# EAGLE board iv4_4lw_tubes_rotated (EAGLE 5.06)
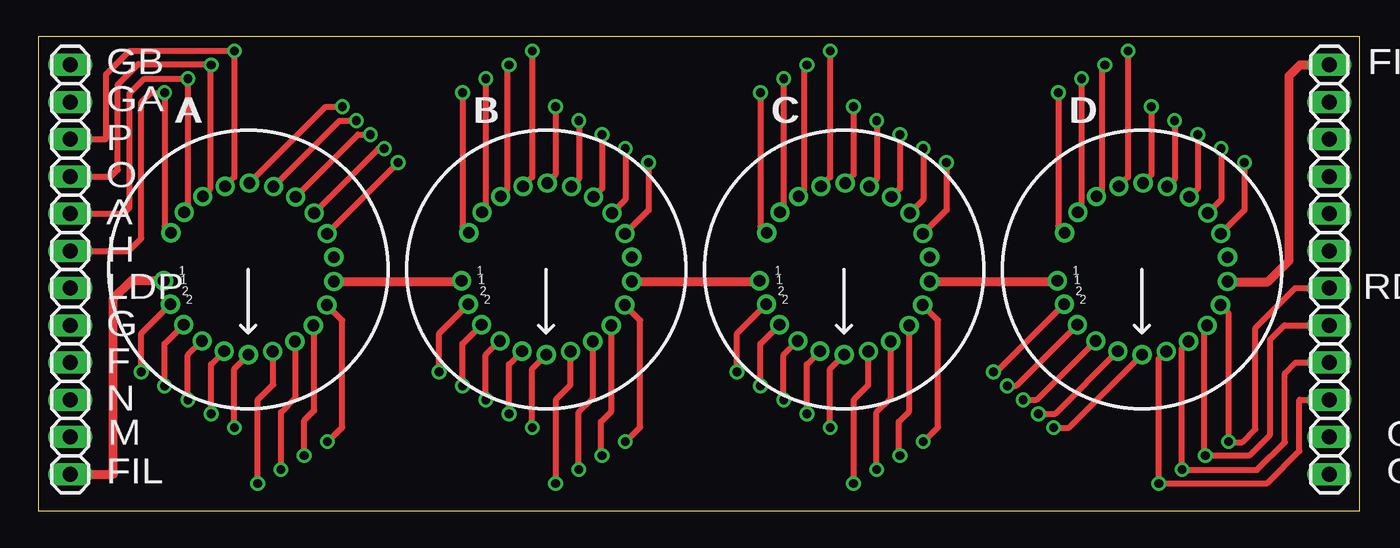
[diagram p0: board, top side]
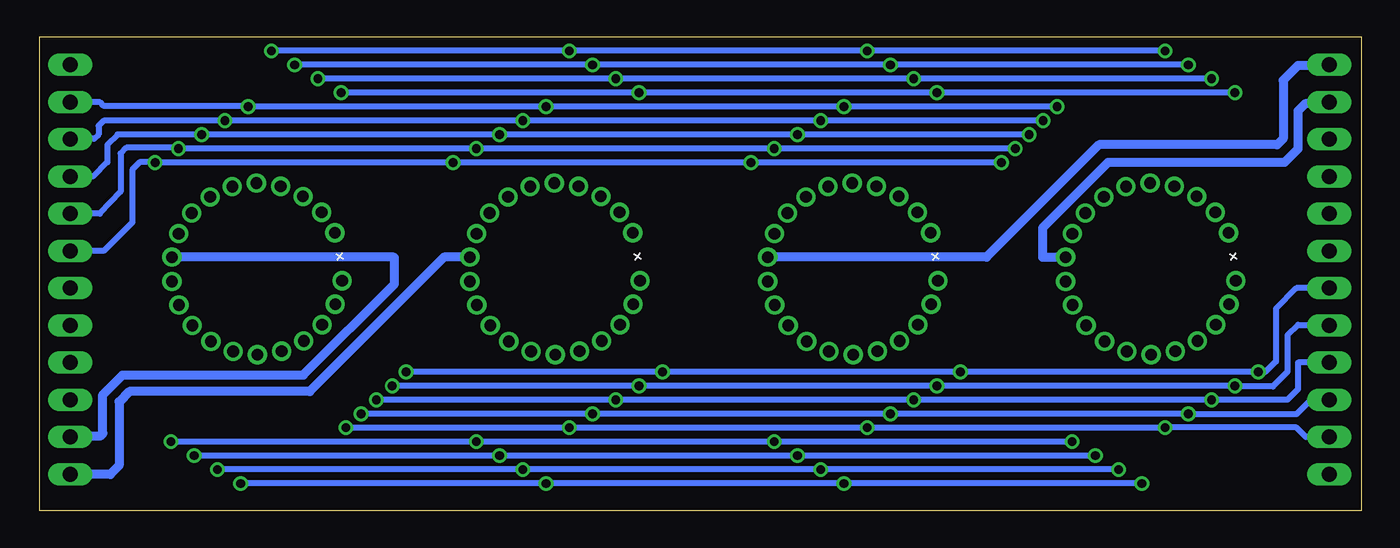
[diagram p1: board, bottom side, seen from below]

Size 90.13 x 32.38 mm. Coordinates in mm from the lower left corner, seen from the top.
Outline: 0,0 90.13,0 90.13,32.37 0,32.38 0,0
Copper layers (1*16): Top 0.035mm / dielectric 1.5mm / Bottom 0.035mm
Design rules "default": minimum track width 10mil, minimum drill 5mil, track to track 5mil, track to pad 5mil, pad to pad 5mil, via to via 5mil, smd to smd 5mil, copper to edge 10mil, drill to drill 8mil, minimum pad ring 10mil, minimum via ring 8mil, stop-mask expansion 4mil, vias tented up to drill 0mil, thermal gap 10mil

## Footprints (pad centres in the part's own frame; a part is rotated, then mirrored left to right if it is on the bottom)
IV-4 = drill 0.8 round: 1 -5.769,-0.759; 2 -5.308,-2.362; 3 -4.414,-3.77; 4 -3.16,-4.869; 5 -1.647,-5.571; 6 0.003,-5.817; 7 1.655,-5.589; 8 3.176,-4.904; 9 4.442,-3.819; 10 5.352,-2.421; 11 5.831,-0.824; 12 5.84,0.844; 13 5.379,2.447; 14 4.485,3.855; 15 3.231,4.954; 16 1.717,5.655; 17 0.068,5.902; 18 -1.584,5.674; 19 -3.105,4.989; 20 -4.372,3.904; 21 -5.281,2.506
1X12 = drill 1.016 long: 1 -13.97,0; 2 -11.43,0; 3 -8.89,0; 4 -6.35,0; 5 -3.81,0; 6 -1.27,0; 7 1.27,0; 8 3.81,0; 9 6.35,0; 10 8.89,0; 11 11.43,0; 12 13.97,0

## Placement (x,y rotation side)
A  IV-4  [IV-4]  14.33,16.48 0 top
B  IV-4  [IV-4]  34.65,16.48 0 top
C  IV-4  [IV-4]  54.97,16.48 0 top
D  IV-4  [IV-4]  75.29,16.48 0 top
JP1  [1X12]  88.06,16.48 270 top
JP2  [1X12]  2.17,16.48 270 top

## Library data of the parts
A B C D = IV-4
JP1 JP2 = pinhead

## Nets
N$1: A.11 B.1
N$2: B.11 C.1
N$3: C.11 D.1
N$4: D.11 JP1.1
N$5: C.12 JP1.12
N$6: D.12 JP1.11
N$7: B.12 JP2.1
N$8: A.12 JP2.2
N$9: A.1 JP2.12
SEG1: A.3 B.3 C.3 D.3 JP2.8
SEG2: A.9 B.9 C.9 D.9 JP1.8
SEG3: A.10 B.10 C.10 D.10 JP1.7
SEG4: A.14 B.14 C.14 D.14 JP1.5
SEG5: A.15 B.15 C.15 D.15 JP1.4
SEG6: A.19 B.19 C.19 D.19 JP2.4
SEG7: A.20 B.20 C.20 D.20 JP2.5
SEG8: A.2 B.2 C.2 D.2 JP2.7
SEG9: A.6 B.6 C.6 D.6 JP2.11
SEG10: A.7 B.7 C.7 D.7 JP1.10
SEG11: A.8 B.8 C.8 D.8 JP1.9
SEG12: A.16 B.16 C.16 D.16 JP1.3
SEG13: A.17 B.17 C.17 D.17 JP1.2
SEG14: A.18 B.18 C.18 D.18 JP2.3
SEG15: A.4 B.4 C.4 D.4 JP2.9
SEG16: A.5 B.5 C.5 D.5 JP2.10
SEG17: A.21 B.21 C.21 D.21 JP2.6
SEG18: A.13 B.13 C.13 D.13 JP1.6

## Tracks (layer width: path | path; a pad name or v marks a point on that pad's centre or on a via)
N$1
  Top 0.61: B.1 28.81,15.66 A.11
N$2
  Top 0.61: C.1 49.13,15.66 B.11
N$3
  Top 0.61: D.1 69.45,15.66 C.11
N$4
  Top 0.61: JP1.1 87.87,30.45 87.88,30.46 86.08,30.46 85.32,29.7 85.32,17.1 83.86,15.64 81.12,15.64 D.11
N$5
  Bottom 0.61: JP1.12 88.03,2.51 88.02,2.5 85.32,2.5 84.72,3.1 84.72,7.46 84.02,8.16 71.72,8.16 62.56,17.33 C.12
N$6
  Bottom 0.61: JP1.11 88.06,5.06 88.02,5.1 86.02,5.1 85.82,5.3 85.88,5.3 85.88,7.88 84.48,9.27 72.16,9.27 65.94,15.5 65.94,17.27 65.99,17.33 D.12
N$7
  Bottom 0.61: JP2.1 2.22,30.5 2.32,30.4 4.32,30.4 5.32,29.4 5.32,25.4 5.73,25 17.88,25 25.55,17.33 B.12
N$8
  Bottom 0.61: JP2.2 2.21,27.91 2.32,27.8 3.82,27.8 4.32,27.3 4.32,24.7 5.24,23.78 17.26,23.78 21.74,19.31 21.74,17.33 A.12
N$9
  Top 0.61: JP2.12 5.12,2.51 5.12,14.5 6.37,15.75 8.53,15.75 A.1
SEG1  (via drill 0.6)
  Top 0.406: D.3 66.7,8.54 v66.09,8.54 | C.3 49.25,11.41 v49.25,8.54 | B.3 28.93,11.41 v28.93,8.54 | A.3 8.61,11.41 v8.61,8.54
  Bottom 0.406: v66.09,8.54 v49.25,8.54 v28.93,8.54 v8.61,8.54 8.61,8.51 8.62,8.5 6.02,8.5 5.02,9.5 5.02,12 4.32,12.7 4.29,12.67 JP2.8
SEG2  (via drill 0.6)
  Top 0.406: JP1.8 84.99,12.67 84.02,11.7 84.02,5.2 82.62,3.8 79.63,3.8 v79.61,3.78 v79.6,3.78 79.53,3.78 79.53,12.46 D.9 | A.9 18.82,12.61 18.82,6.86 18.14,6.18 v18.14,3.78 | B.9 39.09,6.81 38.38,6.1 38.38,3.86 v38.46,3.78 | C.9 59.41,6.81 58.7,6.1 58.7,3.86 v58.78,3.78
  Bottom 0.406: v79.6,3.78 v58.78,3.78 v38.46,3.78 v18.14,3.78
SEG3  (via drill 0.6)
  Top 0.406: JP1.7 85.73,15.21 83.02,12.5 83.02,5.6 82.12,4.7 81.33,4.7 81.23,4.8 81.19,4.76 v81.19,4.73 81.19,13.51 D.10 | v19.72,4.73 20.71,5.72 20.72,5.72 20.72,13.01 A.10 | v40.04,4.73 40.06,4.73 41.04,5.72 41.04,13.01 B.10 | v60.36,4.73 60.38,4.73 61.36,5.72 61.36,13.01 C.10
  Bottom 0.406: v81.19,4.73 v60.36,4.73 v40.04,4.73 v19.72,4.73
SEG4  (via drill 0.6)
  Top 0.406: A.14 23.21,24.74 v23.6,24.74 | B.14 40.04,21.25 v40.04,24.74 | C.14 60.36,21.25 v60.36,24.74 | D.14 80.68,21.25 v80.68,24.74
  Bottom 0.406: v80.68,24.74 v60.36,24.74 39.98,24.74 | v23.6,24.74 39.98,24.74 | v40.04,24.74 40.04,24.78 40.03,24.79 39.98,24.74 | JP1.5 86.04,20.29 84.62,21.8 84.62,24.4 84.22,24.8 80.62,24.8 v80.68,24.74
SEG5  (via drill 0.6)
  Top 0.406: A.15 21.81,25.69 v22.64,25.69 | B.15 38.46,22.01 v38.46,25.69 | C.15 58.78,22.01 v58.78,25.69 | D.15 79.1,22.01 v79.1,25.69
  Bottom 0.406: v22.64,25.69 v38.46,25.69 v58.78,25.69 v79.1,25.69 79.1,25.73 79.12,25.7 84.82,25.7 85.52,25 85.52,23.8 86.5,22.83 JP1.4
SEG6  (via drill 0.6)
  Top 0.406: v11.79,30.45 | JP2.4 4.95,22.83 5.42,23.3 5.42,29.1 6.82,30.5 11.62,30.5 11.72,30.4 v11.77,30.45 v11.79,30.45 | B.19 31.98,21.91 31.98,30.32 v32.11,30.45 | v52.43,30.45 52.22,30.25 52.22,21.83 C.19 | v72.75,30.45 72.54,30.25 72.54,21.83 D.19 | A.19 11.71,21.96 11.71,30.37 v11.79,30.45
  Bottom 0.406: v72.75,30.45 v52.43,30.45 v32.11,30.45 v11.79,30.45
SEG7  (via drill 0.6)
  Top 0.406: v10.2,29.5 10.16,29.5 | JP2.5 5.81,20.29 6.22,20.7 6.22,28.5 7.22,29.5 10.22,29.5 v10.2,29.5 | B.20 30.52,20.63 v30.52,29.5 | C.20 50.84,20.63 v50.84,29.5 | D.20 71.16,20.63 v71.16,29.5 | A.20 10.2,20.63 v10.2,29.5
  Bottom 0.406: v71.16,29.5 v50.84,29.5 v30.52,29.5 v10.2,29.5
SEG8  (via drill 0.6)
  Top 0.406: D.2 65.35,9.5 v65.15,9.5 | C.2 47.66,12.12 v47.66,9.5 | B.2 27.34,12.12 v27.34,9.5 | A.2 7.02,12.12 v7.02,9.5
  Bottom 0.406: v65.15,9.5 v47.66,9.5 v27.34,9.5 v7.02,9.5 | JP2.7 4.41,15.21 5.82,13.8 5.82,10.2 6.52,9.5 v7.02,9.5 | v7.02,9.5
SEG9  (via drill 0.6)
  Top 0.406: D.6 70.31,5.69 v69.25,5.69 | C.6 54.01,9.71 v54.01,5.69 | B.6 33.69,9.71 v33.69,5.69 | A.6 13.37,9.71 v13.37,5.69
  Bottom 0.406: v69.25,5.69 v54.01,5.69 v33.69,5.69 v13.37,5.69 13.37,5.65 13.32,5.6 13.22,5.7 4.42,5.7 3.77,5.05 JP2.11
SEG10  (via drill 0.6)
  Top 0.406: JP1.10 86.04,7.59 86.02,7.6 86.02,4.1 83.82,1.9 76.43,1.9 | 76.41,1.88 76.33,1.8 | v76.43,1.88 76.41,1.88 | 76.41,1.88 76.43,1.9 | A.7 16.03,10.85 16.03,8.64 14.96,7.57 v14.96,1.88 | B.7 36.3,8.59 35.33,7.62 35.33,1.93 v35.28,1.88 | C.7 56.62,8.59 55.65,7.62 55.65,1.93 v55.6,1.88 | 76.43,1.9 76.43,10.38 D.7
  Bottom 0.406: v76.43,1.88 v55.6,1.88 v35.28,1.88 v14.96,1.88
SEG11  (via drill 0.6)
  Top 0.406: JP1.9 85.75,10.13 85.02,9.4 85.02,4.7 83.12,2.8 78.03,2.8 78.02,2.82 v78.02,2.83 78.02,11.13 D.8 | A.8 17.55,11.5 17.55,7.75 16.55,6.75 v16.55,2.83 | B.8 37.82,7.7 36.85,6.73 36.85,2.84 v36.87,2.83 | C.8 58.14,7.7 57.17,6.73 57.17,2.84 v57.19,2.83
  Bottom 0.406: v78.02,2.83 v57.19,2.83 v36.87,2.83 v16.55,2.83
SEG12  (via drill 0.6)
  Top 0.406: A.16 20.55,26.64 v21.69,26.64 | B.16 36.87,22.64 v36.87,26.64 | C.16 57.19,22.64 v57.19,26.64 | D.16 77.51,22.64 v77.51,26.64
  Bottom 0.406: v21.69,26.64 v36.87,26.64 v57.19,26.64 v77.51,26.64 85.78,26.64 86.12,26.3 86.12,25.7 86.42,25.4 88.02,25.4 JP1.3
SEG13  (via drill 0.6)
  Top 0.406: A.17 19.6,27.59 v20.74,27.59 | B.17 35.28,22.95 v35.28,27.59 | C.17 55.6,22.95 v55.6,27.59 | D.17 75.92,22.95 v75.92,27.59
  Bottom 0.406: v20.74,27.59 v35.28,27.59 v55.6,27.59 v75.92,27.59 75.96,27.64 85.76,27.64 86.02,27.9 87.82,27.9 87.92,28 88.02,27.91 JP1.2
SEG14  (via drill 0.6)
  Top 0.406: v13.37,31.4 13.41,31.4 | JP2.3 4.59,25.37 4.62,25.4 4.62,29.8 6.22,31.4 13.42,31.4 v13.37,31.4 | B.18 33.69,22.79 v33.69,31.4 | C.18 54.01,22.79 v54.01,31.4 | D.18 74.33,22.79 v74.33,31.4 | A.18 13.37,22.79 v13.37,31.4
  Bottom 0.406: v74.33,31.4 v54.01,31.4 v33.69,31.4 v13.37,31.4
SEG15  (via drill 0.6)
  Top 0.406: D.4 68.11,7.59 v67.17,7.59 | C.4 50.84,10.64 v50.84,7.59 | B.4 30.52,10.64 v30.52,7.59 | A.4 10.2,10.64 v10.2,7.59
  Bottom 0.406: v67.17,7.59 v50.84,7.59 v30.52,7.59 v10.2,7.59 10.21,7.59 10.22,7.6 5.02,7.6 4.32,8.3 4.32,10.1 4.29,10.13 JP2.9
SEG16  (via drill 0.6)
  Top 0.406: D.5 69.37,6.64 v68.21,6.64 | C.5 52.43,10.02 v52.43,6.64 | B.5 32.11,10.02 v32.11,6.64 | A.5 11.79,10.02 v11.79,6.64
  Bottom 0.406: v68.21,6.64 v52.43,6.64 v32.11,6.64 v11.79,6.64 11.82,6.6 4.42,6.6 3.43,7.59 JP2.10
SEG17  (via drill 0.6)
  Top 0.406: 8.53,28.65 8.61,28.58 v8.61,28.55 | JP2.6 6.17,17.75 7.02,18.6 7.02,27.9 7.62,28.5 8.52,28.5 8.57,28.55 v8.61,28.55 | B.21 28.93,19.42 v28.93,28.55 | C.21 49.25,19.42 v49.25,28.55 | D.21 69.57,19.42 v69.57,28.55 | A.21 8.61,19.42 v8.61,28.55
  Bottom 0.406: v69.57,28.55 v49.25,28.55 v28.93,28.55 v8.61,28.55
SEG18  (via drill 0.6)
  Top 0.406: A.13 24.17,23.39 v24.55,23.78 | B.13 41.63,20.53 v41.63,23.78 | C.13 61.95,20.53 v61.95,23.78 | D.13 82.27,20.53 v82.27,23.78
  Bottom 0.406: v24.55,23.78 v41.63,23.78 v61.95,23.78 v82.27,23.78 82.24,23.78 82.22,23.8 83.32,23.8 83.82,23.3 83.82,19.7 85.78,17.75 JP1.6

## Text on the board
tPlace: GB | FIL | GA | I | P | J | O | K | A | B | H | C | LDP | RDP | G | D | F | E | N | L | M | GD | FIL | GC
_tplace: A | B | C | D | 1 | 1 | 1 | 1 | 2 | 2 | 2 | 2